# Altium PCB ROBIT-2.PcbDoc
Units mil, origin at the board's own origin, x right, y up, seen from the top; angles counter-clockwise.
Board outline 4815 x 3030 mil, 2 copper layers (Top Layer, Bottom Layer); 15 components, 50 nets, 140 pads, 0 vias.
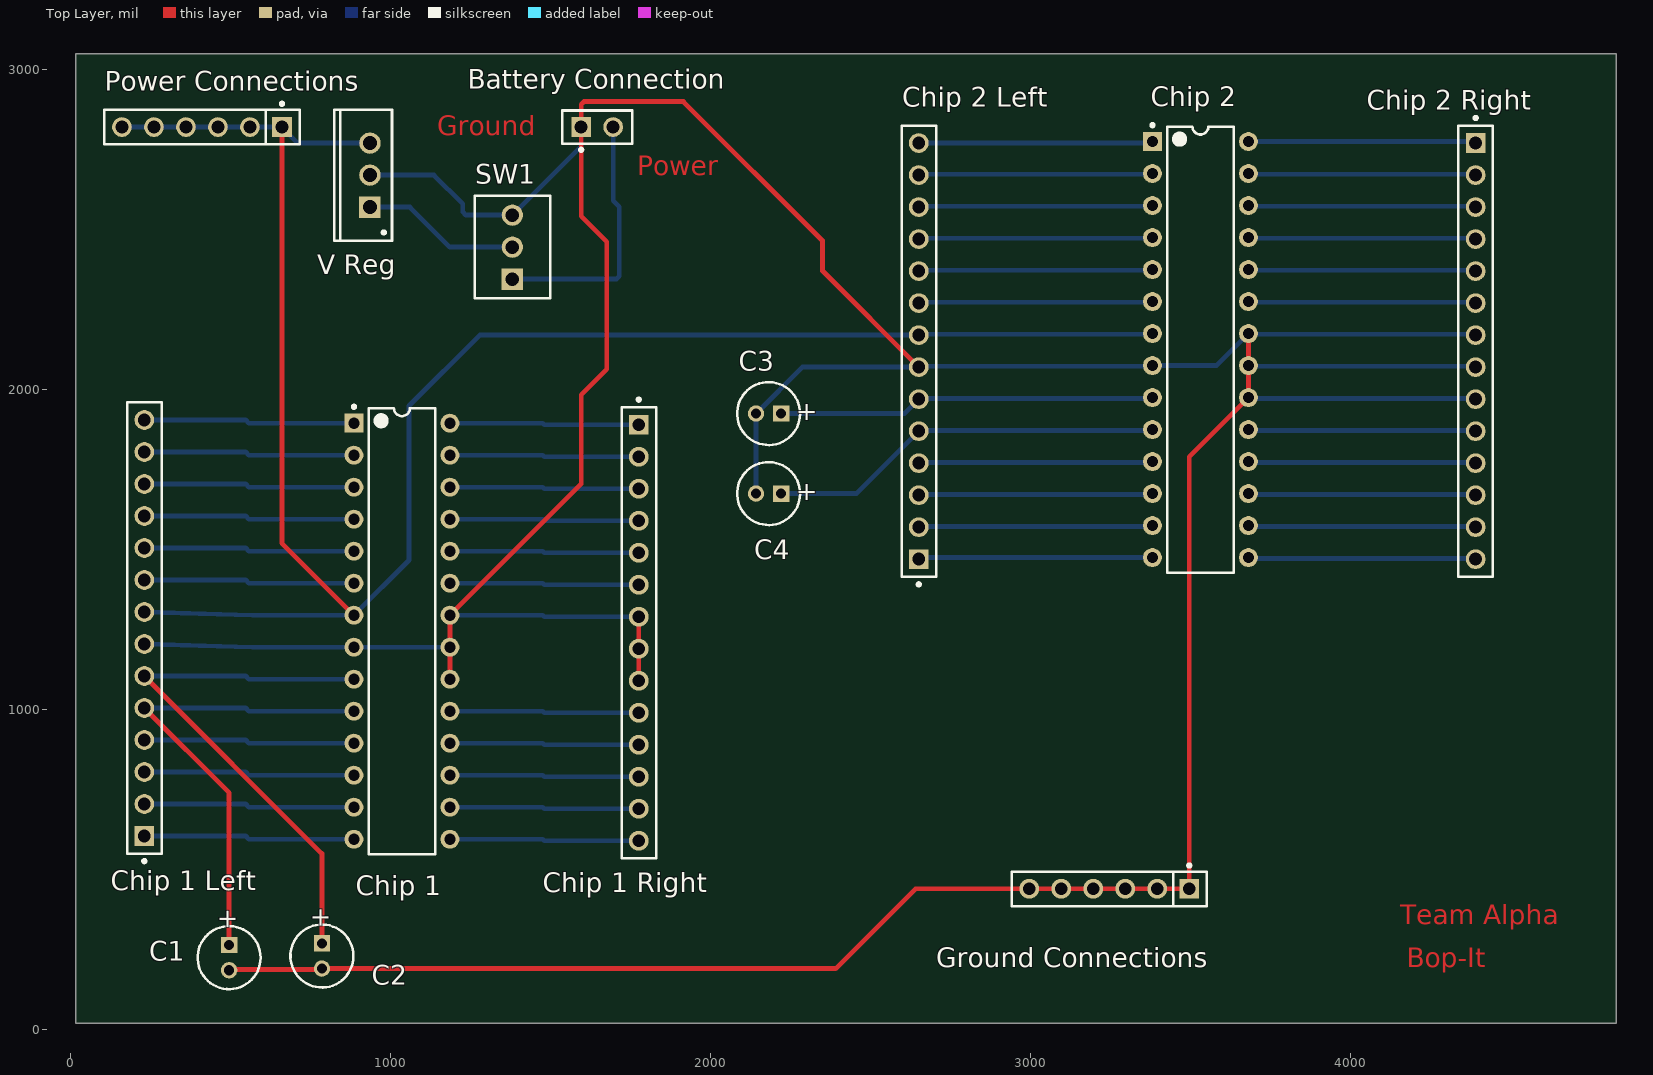
[diagram p0: Top Layer view]
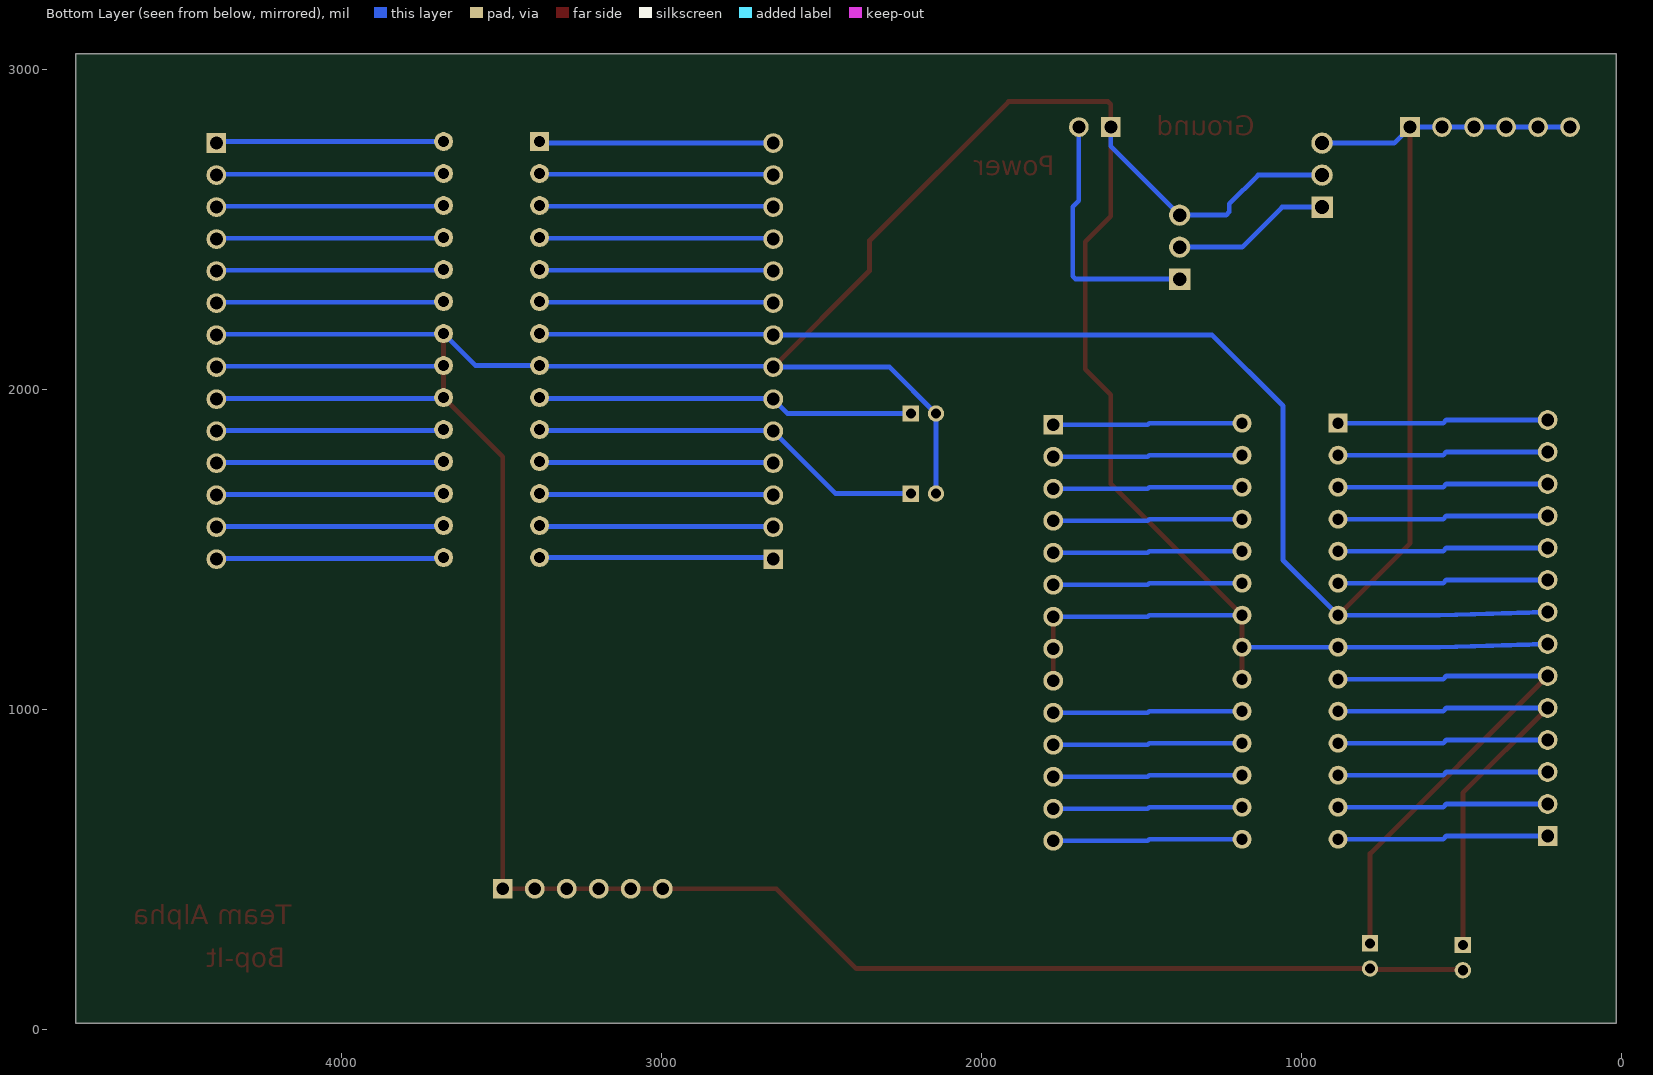
[diagram p1: Bottom Layer view, seen from below]
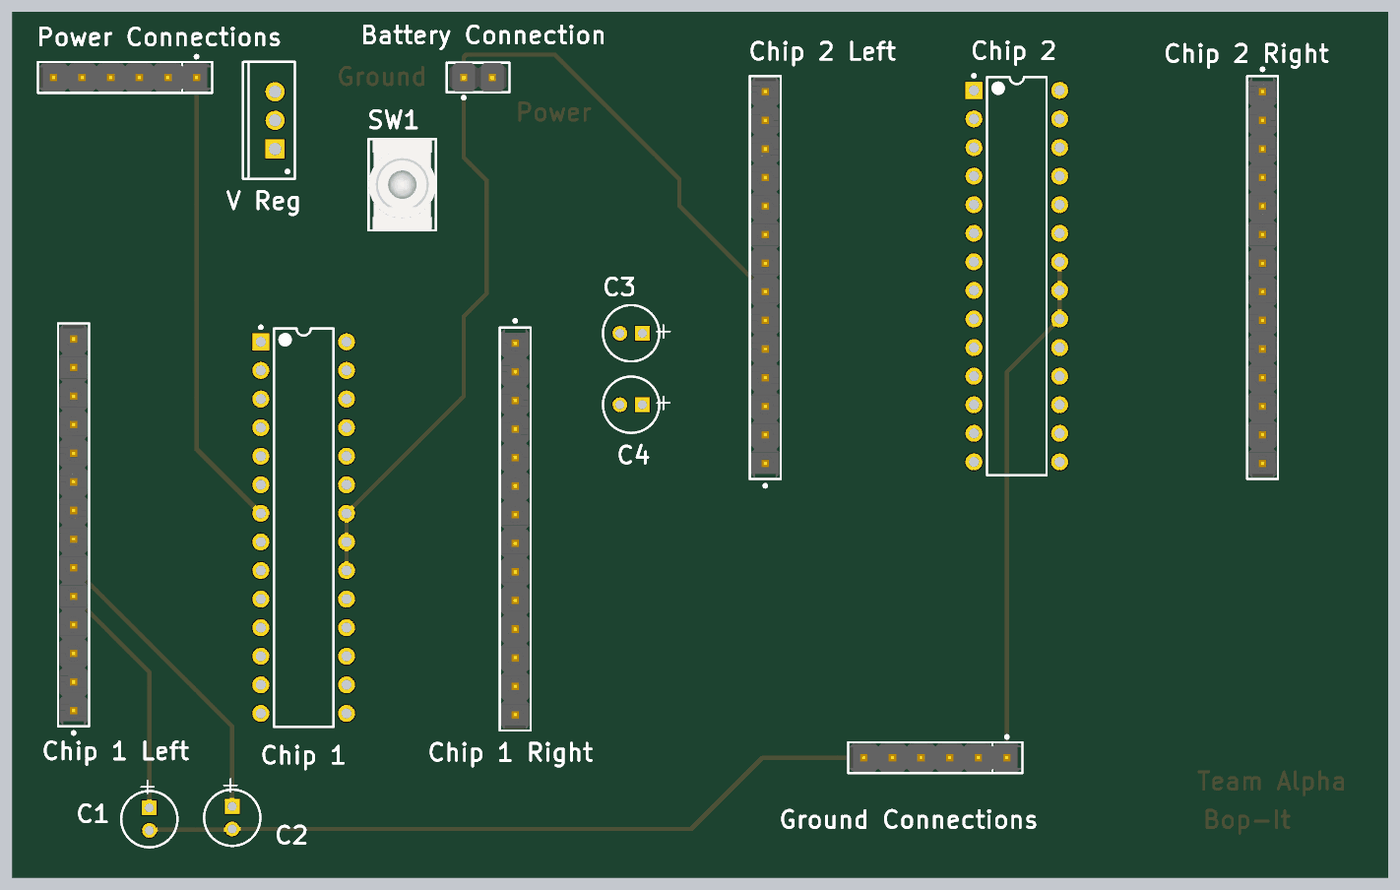
[diagram p2: 3D render of the assembled board from above, using the file's embedded part models]

## Layer stack, top to bottom
Top Solder: solder mask 0.4, Solder Resist, Dk 3.5
Top Layer: signal copper 1.4
Dielectric 1: dielectric 12.6, FR-4, Dk 4.8
Bottom Layer: signal copper 1.4
Bottom Solder: solder mask 0.4, Solder Resist, Dk 3.5

## Board outline
15,20 4830,20 4830,3050 15,3050

## Design rules (kind name [scope] priority, off if disabled: settings)
BoardOutlineClearance [All] p1: gap=7.87 ignorepadtopadclearanceinfootprint=FALSE except(15.75: Arc-SplitBarrior Arc-SplitContinuation Track-SplitBarrior Track-SplitContinuation SMDPad-SplitBarrior SMDPad-SplitContinuation THPad-SplitBarrior THPad-SplitContinuation Via-SplitBarrior Via-SplitContinuation Fill-SplitBarrior Fill-SplitContinuation Poly-SplitBarrior Poly-SplitContinuation Region-SplitBarrior Region-SplitContinuation Text-SplitBarrior Text-SplitContinuation)
Clearance "Clearance Bottom Layer" [OnLayer('Bottom Layer')] p1: gap=8 ignorepadtopadclearanceinfootprint=TRUE except(10: Arc-Text Track-Text SMDPad-Text THPad-Text Via-Text Fill-Text Poly-Text Region-Text Text-Text)
Clearance "Clearance Top Layer" [OnLayer('Top Layer')] p2: gap=8 ignorepadtopadclearanceinfootprint=TRUE except(10: Arc-Text Track-Text SMDPad-Text THPad-Text Via-Text Fill-Text Poly-Text Region-Text Text-Text)
Clearance [All] p3: gap=7.87 ignorepadtopadclearanceinfootprint=FALSE except(3.5: Arc-Arc Arc-Track Arc-SMDPad Track-Track Track-SMDPad SMDPad-SMDPad; 5: Arc-Via Track-Via SMDPad-Via THPad-Via Via-Via; 10: Arc-Text Track-Text SMDPad-Text THPad-Text Via-Text Fill-Text Poly-Text Region-Text Text-Text)
HoleSize [All] p1: absolutevalues=TRUE maxlimit=248.03 minlimit=7.87 maxpercent=80.000 minpercent=20.000
MinimumAnnularRing [All] p1: minimumring=3
MinimumSolderMaskSliver [All] p1: minsoldermaskwidth=3.94
PolygonConnect PolygonConnect_1 [All] p1: thpad.connectstyle=Relief thpad.reliefconductorwidth=20 thpad.reliefentries=4 thpad.polygonreliefangle="90 Angle" thpad.airgapwidth=10 smdpad.connectstyle=Relief smdpad.reliefconductorwidth=20 smdpad.reliefentries=4 smdpad.polygonreliefangle="90 Angle" smdpad.airgapwidth=10 via.connectstyle=Direct via.reliefconductorwidth=20 via.reliefentries=4 via.polygonreliefangle="90 Angle" via.airgapwidth=10
RoutingCorners [All] p1: cornerstyle=Round minsetback=100 maxsetback=100
RoutingVias [All] p1: holewidth=19.68 width=39.37 viastyle="Through Hole" minholewidth=7.87 minwidth=17.72 maxholewidth=39.37 maxwidth=78.74
SilkToSilkClearance [All] p1: silktosilkclearance=3.94
SilkToSolderMaskClearance [IsPad] p1: minsilkscreentomaskgap=3.94 clearancetoexposedcopper=TRUE
SolderMaskExpansion [All] p1: expansion=4 istentingtop=FALSE
Width [All] p1: maxlimit=100 minlimit=3.5 preferedwidth=15
25 further rules are at their usual default settings.

## Components (designator, comment, footprint, x,y, rotation, side; value= is the part's Value field where it differs from the comment)
"Battery Connection" "M20-9990245" FP-M20-9990245-MFG 1645,2820 r0 top
C1 "ECA1HM220" CAPPR55-200-1100X500X1200 495,225 r270 top value=22nF
C2 "ECA1HM220" CAPPR55-200-1100X500X1200 785,230 r270 top value=22nF
C3 "ECA1HM220" CAPPR55-200-1100X500X1200 2180.63,1925 r180 top value=22nF
C4 "ECA1HM220" CAPPR55-200-1100X500X1200 2180.63,1675 r180 top value=22nF
"Chip 1" "ATmega328P-PU" 28P3 1035,1245 r0 top
"Chip 1 Left" "22-28-4146" FP-22-28-4146-MFG 230,1255 r90 top
"Chip 1 Right" "22-28-4146" FP-22-28-4146-MFG 1775,1240 r270 top
"Chip 2" "ATmega328P-PU" 28P3 3530,2125 r0 top
"Chip 2 Left" "22-28-4146" FP-22-28-4146-MFG 2650,2120 r90 top
"Chip 2 Right" "22-28-4146" FP-22-28-4146-MFG 4390,2120 r270 top
"Ground Connections" "22-28-4063" FP-22-28-4063-MFG 3245,440 r180 top
"Power Connections" "22-28-4063" FP-22-28-4063-MFG 410,2820 r180 top
SW1 "TT11AGPC104" FP-TT11AGPC104-MFG 1380,2445 r90 top
"V Reg" "L7805CV" TO220 935,2670 r90 top (schematic designator "Voltage Regulator")

## Footprints (in the part's own frame and the unit in brackets; to place one, negate y for a bottom-side part, rotate by r counter-clockwise, add the part's x,y. Pads: shape width x height; smd on the part's side, far side on the other; paste and mask are expansions set on the pad)
28P3 [mm] "28-Pin Plastic Dual In-Line Package (PDIP)"
  rect 1.5x1.5 hole 0.9: 1(-3.81,16.51)
  round 1.5 hole 0.9: 2(-3.81,13.97) 3(-3.81,11.43) 4(-3.81,8.89) 5(-3.81,6.35) 6(-3.81,3.81) 7(-3.81,1.27) 8(-3.81,-1.27) 9(-3.81,-3.81) 10(-3.81,-6.35) 11(-3.81,-8.89) 12(-3.81,-11.43) 13(-3.81,-13.97) 14(-3.81,-16.51) 15(3.81,-16.51) 16(3.81,-13.97) 17(3.81,-11.43) 18(3.81,-8.89) 19(3.81,-6.35) 20(3.81,-3.81) 21(3.81,-1.27) 22(3.81,1.27) 23(3.81,3.81) 24(3.81,6.35) 25(3.81,8.89) 26(3.81,11.43) 27(3.81,13.97) 28(3.81,16.51)
  silkscreen extent -3.93,-17.7 2.65,17.93, body extent -3.6,-17.65 3.6,17.65, height 4.58
CAPPR55-200-1100X500X1200 [mm] "THD, 2-Leads, Dia 5mm, Pin Spacing 2mm"
  rect 1.3x1.3 hole 0.8: 1(-1,0)
  round 1.3 hole 0.8: 2(1,0)
  silkscreen extent -2.5,-2.5 2.5,2.5, body extent -2.5,-2.5 2.45,2.5, height 12
FP-22-28-4063-MFG [mm]
  rect 1.57x1.57 hole 1.02 paste-2539.97 mask+0: 1(-6.35,0)
  round 1.57 hole 1.02 paste-2539.97 mask+0: 2(-3.81,0) 3(-1.27,0) 4(1.27,0) 5(3.81,0) 6(6.35,0)
  silkscreen extent -7.75,-1.97 7.75,1.37, body extent -7.85,-1.47 7.85,1.47, height 0.25
FP-22-28-4146-MFG [mm]
  rect 1.57x1.57 hole 1.02 paste-2539.97 mask+0: 1(-16.51,0)
  round 1.57 hole 1.02 paste-2539.97 mask+0: 2(-13.97,0) 3(-11.43,0) 4(-8.89,0) 5(-6.35,0) 6(-3.81,0) 7(-1.27,0) 8(1.27,0) 9(3.81,0) 10(6.35,0) 11(8.89,0) 12(11.43,0) 13(13.97,0) 14(16.51,0)
  silkscreen extent -18.63,-1.37 17.91,1.37, body extent -18.01,-1.47 18.01,1.47, height 0.25
FP-M20-9990245-MFG [mm]
  rect 1.57x1.57 hole 1.02 paste-2539.97 mask+0: 1(-1.27,0)
  round 1.57 hole 1.02 paste-2539.97 mask+0: 2(1.27,0)
  silkscreen extent -2.79,-1.92 2.79,1.32, body extent -2.89,-1.42 2.89,1.42, height 0.25
FP-TT11AGPC104-MFG [mm]
  rect 1.69x1.69 hole 1.09 paste-2539.97 mask+0: 1(-2.54,0)
  round 1.69 hole 1.09 paste-2539.97 mask+0: 2(0,0) 3(2.54,0)
  silkscreen extent -4.07,-3 4.07,3, body extent -4.17,-3.1 4.17,3.1, height 0.25
TO220 [mm] "TO, Thru-Hole, Vertical, Heatsink Mounted; 3 In-Line Leads; Pitch 2.54 mm"
  rect 1.7x1.7 hole 1.1: 1(-2.54,0)
  round 1.7 hole 1.1: 2(0,0) 3(2.54,0)
  silkscreen extent -5.2,-1.75 5.2,2.85, body extent -5.25,-1.8 5.25,2.9, height 19.7

## Part data
"Battery Connection": library part CMP-15831-000105-1, "CONN HEADER VERT 2POS 2.54MM", Case/Package=SIL, Color=Black, Contact Resistance=25mR, Current=3A, Flammability Rating="UL94 V-0", Insulation Resistance=10GR, Max Operating Temperature=105°C, Min Operating Temperature=-40°C, Package Quantity=1000, Voltage=50V, Voltage Rating (AC)=750V, Connector Type="Male Pin", Contact Finish - Mating=GOLD, Contact Material=Brass, Contact Mating Length=0.24inch, Contact Plating=Gold, Contact Shape=Square, Contact Type="Male Pin", Current Rating=3A, Depth=2.54mm, Fastening Type=Pull, Gender=Male, Height=0.12inch, Housing Color=Black, Housing Material=Nylon, Insulation Color=Black, Insulation Material=Nylon, Lead Pitch=2.54mm, Length=5.08mm, Mated Stacking Heights=16.54mm, Mating Cycles=300, Max Current Rating=3A, Mount="Through Hole", Number of Contacts=2, Number of Poles=2, Number of Positions=2, Number of Rows=1, Orientation=Straight, Packaging=Bulk, Pitch=2.54mm, Radiation Hardening=No, Reach SVHC Compliant=Yes, Series=M20, Termination=Solder, Weight=0.25lb, Width=0.25inch, Working Voltage=750V
C1 C2 C3 C4: library part CMP-001-00027-5, "Aluminum Electrolytic Capacitor, 22 uF, +/- 20%, 50 V, -40 to 85 degC, 2-Pin THD, RoHS, Bulk", Capacitor Type=Electrolytic, Case/Package=Radial, Manufacturer=Panasonic, Max Operating Temperature=85°C, Min Operating Temperature=-40°C, Package Description="2-Pin Radial Lead, Dia 5 mm, Height 12 mm", Package Quantity=200, Package Reference=CAPPR55-200-1100X500X1200, Ripple Current=100mA, Tolerance=20%, Voltage Rating=50V, Datasheet URL=https://industrial.panasonic.com/cdbs/www-data/pdf/RDF0000/ABA0000C1218.pdf, Datasheet Version="Rev. 05, 10/2016", Diameter=5mm, Lead Pitch=2mm, Manufacturer URL=http://www.panasonic.com/, Mounting Technology=TH, Packaging=Bulk, Pins=2, Ripple Current (AC)=100mA, RoHS Compliant=True
"Chip 1" "Chip 2": library part CMP-0095-00013-2, "8-bit AVR Microcontroller, 32KB Flash, 1KB EEPROM, 2KB SRAM, 28-pin PDIP, Industrial Grade (-40°C to 85°C)", ComponentLink1Description="Manufacturer URL", ComponentLink1URL=http://www.atmel.com/, ComponentLink2Description="ATmega48A/48PA/88A/88PA/168A/168PA/328/328P Datasheet", ComponentLink2URL=http://www.atmel.com/dyn/resources/prod_documents/8271.pdf, ComponentLink3Description="ATmega48A/48PA/88A/88PA/168A/168PA/328/328P Summary", ComponentLink3URL=http://www.atmel.com/dyn/resources/prod_documents/8271S.pdf, DatasheetVersion="revD, May-2011", PackageDescription="28-lead (0.300\"/7.62mm Wide) Plastic Dual Inline Package (PDIP)", PackageReference=28P3, PackageVersion="revB, Sep-2001", RevisionNote="DatasheetVersion updated. URLs added."
"Chip 1 Left" "Chip 1 Right" "Chip 2 Left" "Chip 2 Right": library part CMP-04776-000356-1, "CONN HEADER VERT 14POS 2.54MM", Color=Black, Current Rating=4A, Package Quantity=1, Voltage Rating=250V, Connector Type="Male Pin", Contact Gender=Male, Contact Material=Brass, Contact Mating Length=0.24inch, Contact Plating=Gold, Contact Type="Male Pin", Gender=Male, Glow Wire Compliant=Non-compliant, Height=2.29mm, Housing Color=Black, Housing Material=Thermoplastic, Lead Free="Lead Free", Length=35.6mm, Mount="Through Hole", Number of Circuits=14, Number of Contacts=14, Number of Positions=14, Number of Rows=1, Orientation=Vertical, Packaging=Bulk, Pitch=0.1inch, RoHS Compliant=Yes, Series="KK® 42375", Termination=Solder, Width=2.49mm
"Ground Connections" "Power Connections": library part CMP-04776-000885-1, "CONN HEADER VERT 6POS 2.54MM", Color=Black, Contact Resistance=20mR, Current Rating=4A, Flammability Rating="UL94 V-0", Max Operating Temperature=75°C, Max Voltage Rating (AC)=250V, Max Voltage Rating (DC)=250.25kV, Min Operating Temperature=0°C, Package Quantity=1, Connector Type="Male Pin", Contact Material=Brass, Contact Mating Length=0.24inch, Contact Plating=Gold, Contact Type="Male Pin", Depth=2.49mm, Gender=Male, Glow Wire Compliant=Non-compliant, Housing Color=Black, Housing Material=Thermoplastic, Lead Free="Lead Free", Mount="Through Hole", Number of Circuits=6, Number of Contacts=6, Number of Positions=6, Number of Rows=1, Orientation=Straight, Packaging=Bulk, Pitch=2.54mm, Radiation Hardening=No, RoHS Compliant=Yes, Series="KK® 42375", Termination=Solder, Voltage Rating=250V, Voltage Rating (DC)=250V
SW1: library part CMP-03408-000020-1, "SWITCH TOGGLE SPST 0.4VA 20V", Contact Current Rating=3A, Max Operating Temperature=85°C, Max Voltage Rating (AC)=20V, Min Operating Temperature=-30°C, Package Quantity=25, Power Rating=400mW, Actuator Length=5.61mm, Actuator Type=Toggle, Contact Plating=Gold, Illumination Type=Illuminated, Max Voltage Rating (DC)=20V, Mount=Brackets, Orientation=Straight, Packaging=Bulk, RoHS Compliant=Yes, Series="TT (Tiny)", Termination="PC Pins", Throw Configuration=SPST, Voltage Rating (AC)=20V, Voltage Rating (DC)=20V
"V Reg": library part CMP-0244-00483-1, "Positive Voltage Regulator, 5V, 3-Pin TO-220", ComponentLink1Description="Manufacturer URL", ComponentLink1URL=http://www.st.com, ComponentLink2Description=Datasheet, ComponentLink2URL=http://www.st.com/internet/com/TECHNICAL_RESOURCES/TECHNICAL_LITERATURE/DATASHEET/CD00000444.pdf, ComponentLink3Description="Package Specification", ComponentLink3URL=http://www.st.com/internet/com/TECHNICAL_RESOURCES/TECHNICAL_LITERATURE/PACKAGE_INFORMATION/CD00004649.pdf, DatasheetVersion=16/11/2011, PackageDescription="TO, Thru-Hole, Vertical, Heatsink Mounted; 3 In-Line Leads; Pitch 2.54 mm", PackageReference=TO220, PackageVersion=ver3.0

## Nets (pads, with @x,y where several pads share a name; then routed paths per layer and width w, separated by ;. In a path a pad name is that pad's centre, name@x,y a point inside that pad or via, vN(x,y) a via of type N, cw(c..) or ccw(c..) an arc to the next point about the centre after c; other vN are vias at no path point)
GND: "Battery Connection.2" SW1.1 | length 811.4
  Bottom Layer w15: SW1.1 1705,2345 1713.79,2353.79 1713.79,2571.17 1695,2589.95 1695,2820
NetC1_1: "Chip 1 Left.5" "Chip 1.10" C1.1 | length 1509.5
  Top Layer w15: 230,1005 495,740 C1.1
  Bottom Layer w15: 230,1005 547,1005 557,995 885,995
NetC2_1: "Chip 1 Left.6" "Chip 1.9" C2.1 | length 1724.7
  Top Layer w15: 230,1105 785,550 C2.1
  Bottom Layer w15: 230,1105 547,1105 557,1095 885,1095
NetC3_1: "Chip 2 Left.6" "Chip 2.9" C3.1 | length 1180.7
  Bottom Layer w15: C3.1 2605,1925 2650,1970 2652.5,1972.5 3377.5,1972.5 3380,1975
NetC4_1: "Chip 2 Left.5" "Chip 2.10" C4.1 | length 1242.8
  Bottom Layer w15: C4.1 2455,1675 2650,1870 2652.5,1872.5 3377.5,1872.5 3380,1875
"NetChip 1 Left_1": "Chip 1 Left.1" "Chip 1.14" | length 659.1
  Bottom Layer w15: 230,605 547,605 557,595 885,595
"NetChip 1 Left_2": "Chip 1 Left.2" "Chip 1.13" | length 659.1
  Bottom Layer w15: 230,705 547,705 557,695 885,695
"NetChip 1 Left_3": "Chip 1 Left.3" "Chip 1.12" | length 659.1
  Bottom Layer w15: 230,805 547,805 557,795 885,795
"NetChip 1 Left_4": "Chip 1 Left.4" "Chip 1.11" | length 659.1
  Bottom Layer w15: 230,905 547,905 557,895 885,895
"NetChip 1 Left_8": "Chip 1 Left.8" "Chip 1.7" "Chip 2 Left.8" "Chip 2.7" "Power Connections.1" "Power Connections.2" "Power Connections.3" "Power Connections.4" "Power Connections.5" "Power Connections.6" "V Reg.3" | length 6210.9
  Top Layer w15: 660,2820 660,1520 885,1295
  Bottom Layer w15: 160,2820 260,2820 360,2820 460,2820 560,2820 660,2820 710,2770 935,2770 ; 230,1305 568,1295 885,1295 1057,1467 1057,1949 1278,2170 2650,2170 2652.5,2172.5 3377.5,2172.5 3380,2175
"NetChip 1 Left_9": "Chip 1 Left.9" "Chip 1.6" | length 659.1
  Bottom Layer w15: 230,1405 547,1405 557,1395 885,1395
"NetChip 1 Left_10": "Chip 1 Left.10" "Chip 1.5" | length 659.1
  Bottom Layer w15: 230,1505 547,1505 557,1495 885,1495
"NetChip 1 Left_11": "Chip 1 Left.11" "Chip 1.4" | length 659.1
  Bottom Layer w15: 230,1605 547,1605 557,1595 885,1595
"NetChip 1 Left_12": "Chip 1 Left.12" "Chip 1.3" | length 659.1
  Bottom Layer w15: 230,1705 547,1705 557,1695 885,1695
"NetChip 1 Left_13": "Chip 1 Left.13" "Chip 1.2" | length 659.1
  Bottom Layer w15: 230,1805 547,1805 557,1795 885,1795
"NetChip 1 Left_14": "Chip 1 Left.14" "Chip 1.1" | length 659.1
  Bottom Layer w15: 230,1905 547,1905 557,1895 885,1895
"NetChip 1 Right_1": "Chip 1 Right.1" "Chip 1.28" | length 592.1
  Bottom Layer w15: 1185,1895 1475,1895 1480,1890 1775,1890
"NetChip 1 Right_2": "Chip 1 Right.2" "Chip 1.27" | length 592.1
  Bottom Layer w15: 1185,1795 1475,1795 1480,1790 1775,1790
"NetChip 1 Right_3": "Chip 1 Right.3" "Chip 1.26" | length 592.1
  Bottom Layer w15: 1185,1695 1475,1695 1480,1690 1775,1690
"NetChip 1 Right_4": "Chip 1 Right.4" "Chip 1.25" | length 592.1
  Bottom Layer w15: 1185,1595 1475,1595 1480,1590 1775,1590
"NetChip 1 Right_5": "Chip 1 Right.5" "Chip 1.24" | length 592.1
  Bottom Layer w15: 1185,1495 1475,1495 1480,1490 1775,1490
"NetChip 1 Right_6": "Chip 1 Right.6" "Chip 1.23" | length 592.1
  Bottom Layer w15: 1185,1395 1475,1395 1480,1390 1775,1390
"NetChip 1 Right_10": "Chip 1 Right.10" "Chip 1.19" | length 592.1
  Bottom Layer w15: 1185,995 1475,995 1480,990 1775,990
"NetChip 1 Right_11": "Chip 1 Right.11" "Chip 1.18" | length 592.1
  Bottom Layer w15: 1185,895 1475,895 1480,890 1775,890
"NetChip 1 Right_12": "Chip 1 Right.12" "Chip 1.17" | length 592.1
  Bottom Layer w15: 1185,795 1475,795 1480,790 1775,790
"NetChip 1 Right_13": "Chip 1 Right.13" "Chip 1.16" | length 592.1
  Bottom Layer w15: 1185,695 1475,695 1480,690 1775,690
"NetChip 1 Right_14": "Chip 1 Right.14" "Chip 1.15" | length 592.1
  Bottom Layer w15: 1185,595 1475,595 1480,590 1775,590
"NetChip 2 Left_1": "Chip 2 Left.1" "Chip 2.14" | length 732.1
  Bottom Layer w15: 2650,1470 2655,1475 3380,1475
"NetChip 2 Left_2": "Chip 2 Left.2" "Chip 2.13" | length 732.1
  Bottom Layer w15: 2650,1570 2652.5,1572.5 3377.5,1572.5 3380,1575
"NetChip 2 Left_3": "Chip 2 Left.3" "Chip 2.12" | length 732.1
  Bottom Layer w15: 2650,1670 2652.5,1672.5 3377.5,1672.5 3380,1675
"NetChip 2 Left_4": "Chip 2 Left.4" "Chip 2.11" | length 732.1
  Bottom Layer w15: 2650,1770 2652.5,1772.5 3377.5,1772.5 3380,1775
"NetChip 2 Left_9": "Chip 2 Left.9" "Chip 2.6" | length 732.1
  Bottom Layer w15: 2650,2270 2652.5,2272.5 3377.5,2272.5 3380,2275
"NetChip 2 Left_10": "Chip 2 Left.10" "Chip 2.5" | length 732.1
  Bottom Layer w15: 2650,2370 2652.5,2372.5 3377.5,2372.5 3380,2375
"NetChip 2 Left_11": "Chip 2 Left.11" "Chip 2.4" | length 732.1
  Bottom Layer w15: 2650,2470 2652.5,2472.5 3377.5,2472.5 3380,2475
"NetChip 2 Left_12": "Chip 2 Left.12" "Chip 2.3" | length 732.1
  Bottom Layer w15: 2650,2570 2652.5,2572.5 3377.5,2572.5 3380,2575
"NetChip 2 Left_13": "Chip 2 Left.13" "Chip 2.2" | length 732.1
  Bottom Layer w15: 2650,2670 2652.5,2672.5 3377.5,2672.5 3380,2675
"NetChip 2 Left_14": "Chip 2 Left.14" "Chip 2.1" | length 732.1
  Bottom Layer w15: 2650,2770 3375,2770 3380,2775
"NetChip 2 Right_1": "Chip 2 Right.1" "Chip 2.28" | length 712.1
  Bottom Layer w15: 3680,2775 4385,2775 4390,2770
"NetChip 2 Right_2": "Chip 2 Right.2" "Chip 2.27" | length 712.1
  Bottom Layer w15: 3680,2675 3682.5,2672.5 4387.5,2672.5 4390,2670
"NetChip 2 Right_3": "Chip 2 Right.3" "Chip 2.26" | length 712.1
  Bottom Layer w15: 3680,2575 3682.5,2572.5 4387.5,2572.5 4390,2570
"NetChip 2 Right_4": "Chip 2 Right.4" "Chip 2.25" | length 712.1
  Bottom Layer w15: 3680,2475 3682.5,2472.5 4387.5,2472.5 4390,2470
"NetChip 2 Right_5": "Chip 2 Right.5" "Chip 2.24" | length 712.1
  Bottom Layer w15: 3680,2375 3682.5,2372.5 4387.5,2372.5 4390,2370
"NetChip 2 Right_6": "Chip 2 Right.6" "Chip 2.23" | length 712.1
  Bottom Layer w15: 3680,2275 3682.5,2272.5 4387.5,2272.5 4390,2270
"NetChip 2 Right_10": "Chip 2 Right.10" "Chip 2.19" | length 712.1
  Bottom Layer w15: 3680,1875 3682.5,1872.5 4387.5,1872.5 4390,1870
"NetChip 2 Right_11": "Chip 2 Right.11" "Chip 2.18" | length 712.1
  Bottom Layer w15: 3680,1775 3682.5,1772.5 4387.5,1772.5 4390,1770
"NetChip 2 Right_12": "Chip 2 Right.12" "Chip 2.17" | length 712.1
  Bottom Layer w15: 3680,1675 3682.5,1672.5 4387.5,1672.5 4390,1670
"NetChip 2 Right_13": "Chip 2 Right.13" "Chip 2.16" | length 712.1
  Bottom Layer w15: 3680,1575 3682.5,1572.5 4387.5,1572.5 4390,1570
"NetChip 2 Right_14": "Chip 2 Right.14" "Chip 2.15" | length 712.1
  Bottom Layer w15: 3680,1475 3682.5,1472.5 4387.5,1472.5 4390,1470
NetSW1_2: "V Reg.1" SW1.2 | length 496.8
  Bottom Layer w15: 935,2570 1060,2570 1185,2445 SW1.2
Vcc: "Battery Connection.1" "Chip 1 Left.7" "Chip 1 Right.7" "Chip 1 Right.8" "Chip 1 Right.9" "Chip 1.8" "Chip 1.20" "Chip 1.21" "Chip 1.22" "Chip 2 Left.7" "Chip 2 Right.7" "Chip 2 Right.8" "Chip 2 Right.9" "Chip 2.8" "Chip 2.20" "Chip 2.21" "Chip 2.22" "Ground Connections.1" "Ground Connections.2" "Ground Connections.3" "Ground Connections.4" "Ground Connections.5" "Ground Connections.6" "V Reg.2" C1.2 C2.2 C3.2 C4.2 SW1.3 | length 15058.4
  Top Layer w15: C1.2 497.5,188.13 782.5,188.13 C2.2 2390.63,190.63 2640,440 2995,440 3095,440 3195,440 3295,440 3395,440 3495,440 3495,1790 3680,1975 3680,2075 3680,2175 ; 1185,1095 1185,1195 1185,1295 1595,1705 1595,1983.75 1675,2063.75 1675,2461.25 1595,2541.25 1595,2820 1595,2891.21 1603.79,2900 1914.64,2900 2349.1,2465.54 2349.1,2370.9 2650,2070 ; 1775,1090 1775,1190 1775,1290
  Bottom Layer w15: 230,1205 568,1195 885,1195 1185,1195 ; 935,2670 1135,2670 1225,2580 1225,2555 1235,2545 SW1.3 1595,2760 1595,2820 ; 1185,1295 1475,1295 1480,1290 1775,1290 ; C4.2 C3.2 2286.26,2070 2650,2070 2652.5,2072.5 3377.5,2072.5 3380,2075 3580,2075 3680,2175 3682.5,2172.5 4387.5,2172.5 4390,2170 ; 3680,1975 3682.5,1972.5 4387.5,1972.5 4390,1970 ; 3680,2075 3682.5,2072.5 4387.5,2072.5 4390,2070

## Other copper
Top Layer:
  text "Ground" at 1145,2795 h60
  text "Power" at 1770,2670 h60
  text "Team Alpha" at 4155,329.99 h60
  text "Bop-It" at 4175,194.99 h60

## Text inside footprints (layer, text, board x,y; h text height)
C1: Top Overlay "+" at 465.98,378.86 h59.06 r270
C2: Top Overlay "+" at 755.98,383.86 h59.06 r270
C3: Top Overlay "+" at 2334.49,1954.02 h59.06 r180
C4: Top Overlay "+" at 2334.49,1704.02 h59.06 r180